# Altium PCB horus_psu.PcbDoc
Units mm, origin at the board's own origin, x right, y up, seen from the top; angles counter-clockwise.
Board outline 32.23 x 19.11 mm, 2 copper layers (Top Layer, Bottom Layer); 19 components, 14 nets, 75 pads, 18 vias.
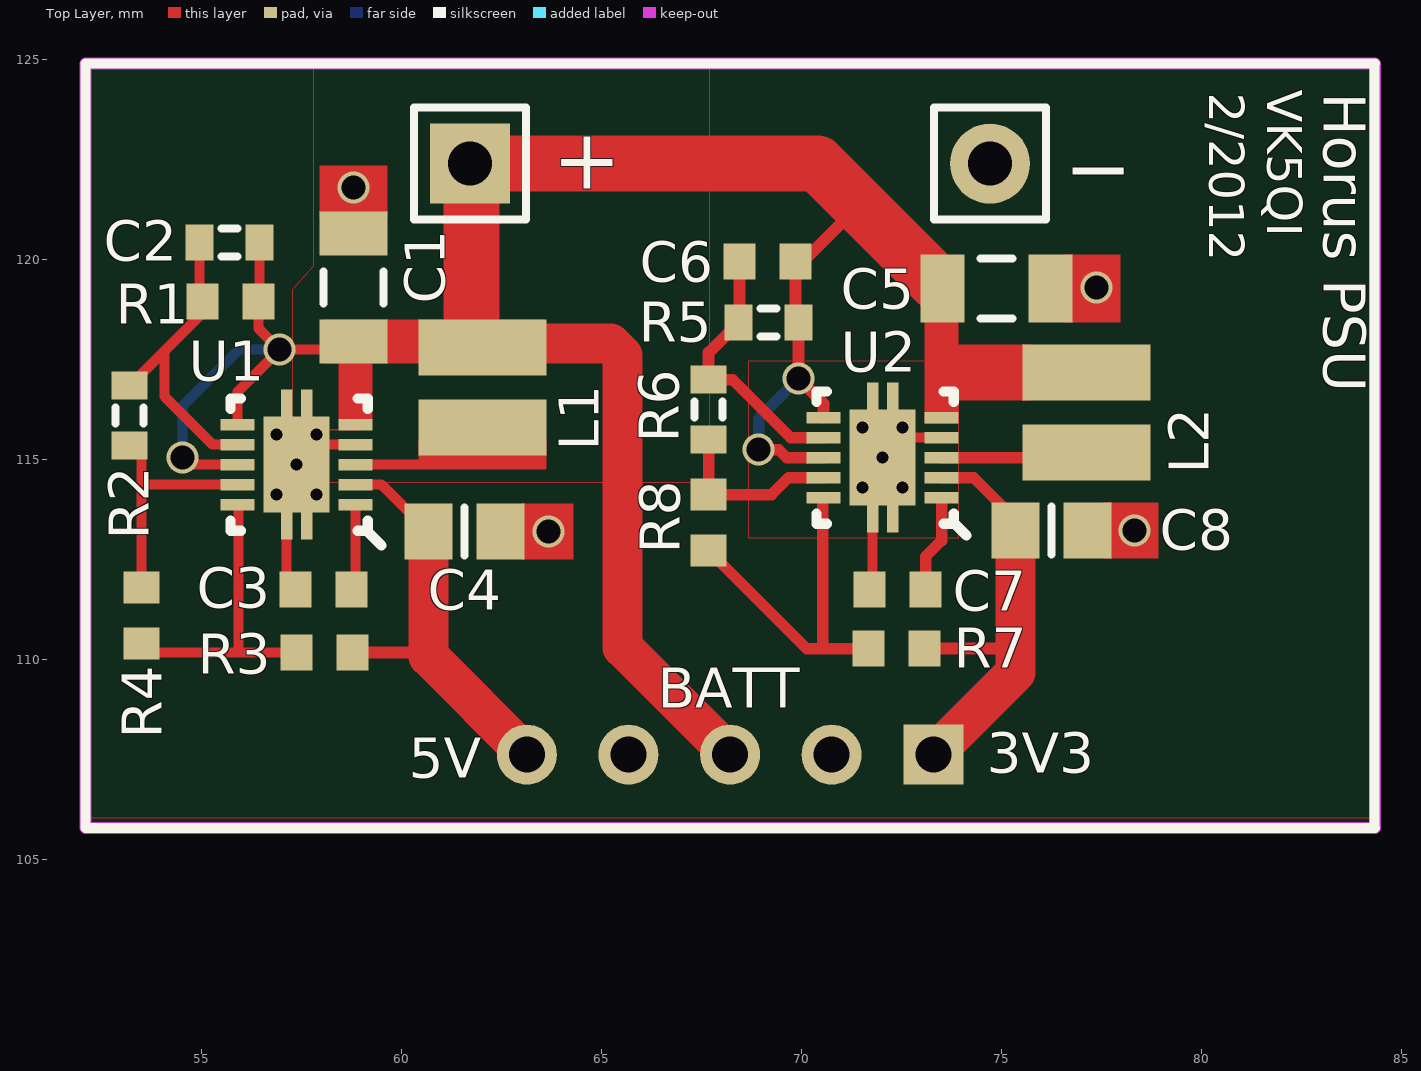
[diagram p0: Top Layer view]
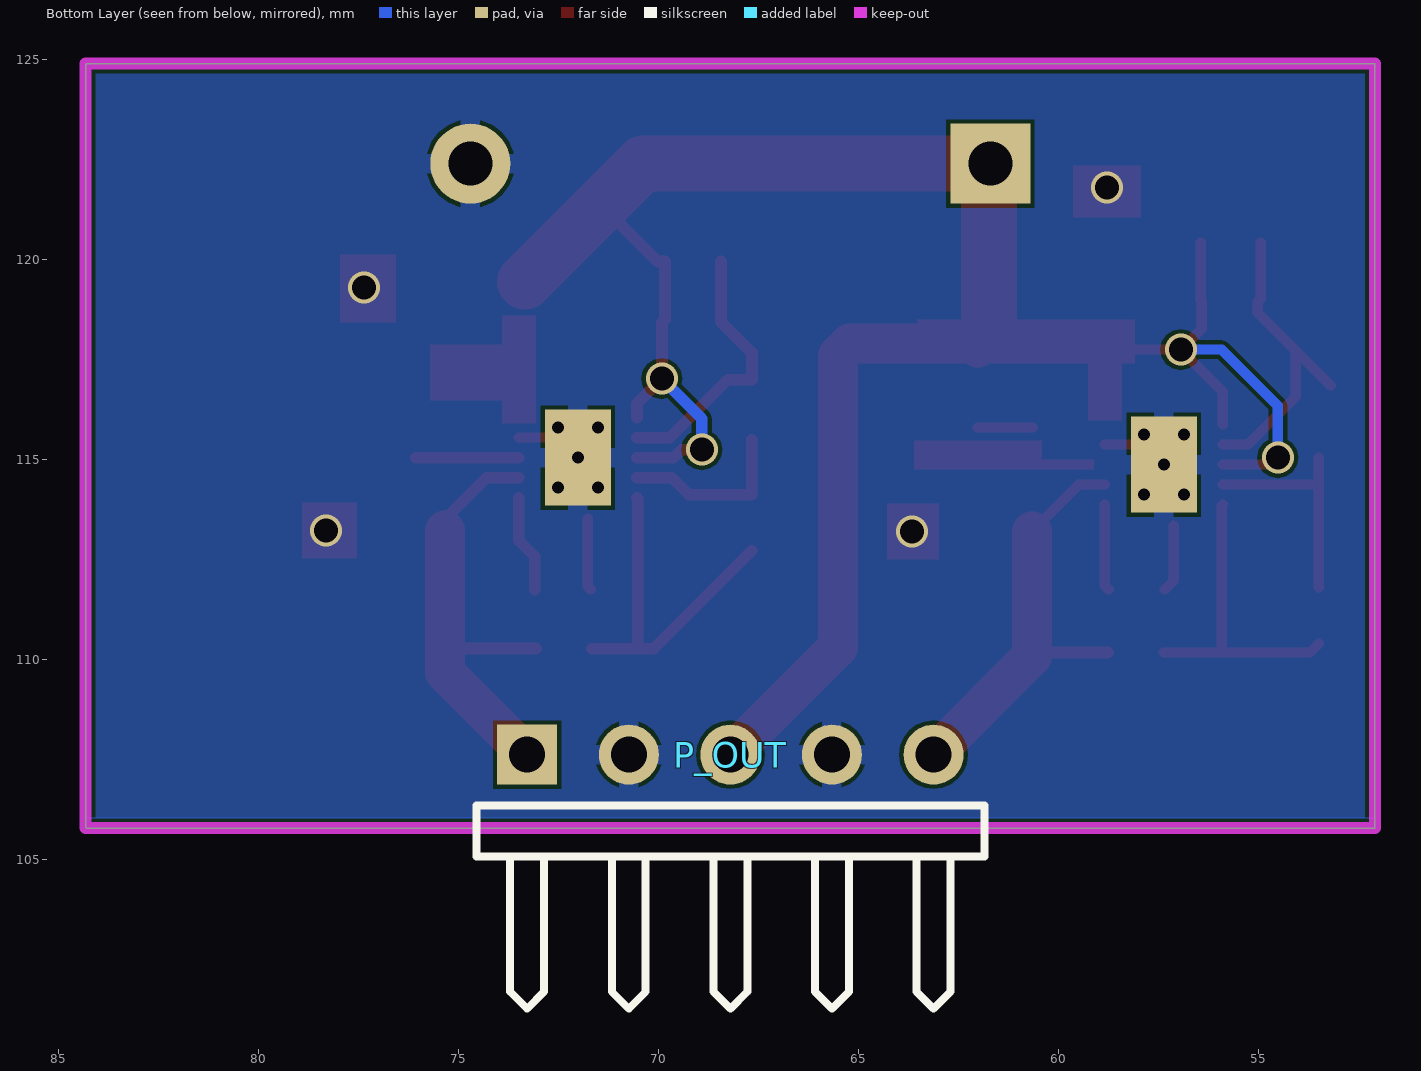
[diagram p1: Bottom Layer view, seen from below]

## Layer stack, top to bottom
Top Layer: signal copper 0.0356
Dielectric: dielectric 0.32, FR-4, Dk 4.8
Bottom Layer: signal copper 0.0356

## Board outline
52.1,105.791 52.1,124.9 84.328,124.9 84.328,105.791

## Design rules (kind name [scope] priority, off if disabled: settings)
Clearance [All] p1: gap=0.1
ComponentClearance [All] p1 off: gap=0.254 collisioncheckmode=3 verticalgap=0.254 showdistances=FALSE
PolygonConnect PolygonConnect_1 [IsVia] p1: connectstyle=Direct reliefconductorwidth=0.254 reliefentries=4 polygonreliefangle="90 Angle"
PolygonConnect [All] p2: connectstyle=Relief reliefconductorwidth=0.5 reliefentries=4 polygonreliefangle="90 Angle"
RoutingVias [All] p1: holewidth=0.3 width=0.4 viastyle="Through Hole" minholewidth=0.711 minwidth=1.27 maxholewidth=0.711 maxwidth=1.27
SilkscreenOverComponentPads [All] p1: minsilkscreentomaskgap=0.254
SolderMaskExpansion [All] p1: expansion=0.102
Width [All] p1: maxlimit=5 minlimit=0.1 preferedwidth=0.3
26 further rules are at their usual default settings.

## Components (designator, comment, footprint, x,y, rotation, side; value= is the part's Value field where it differs from the comment)
C1 "10V" C1206 58.8,119.3 r270 top
C2 "Cap Semi" 1608[0603] 55.725,118.95 r0 top
C3 "Cap Semi" 1608[0603] 58.05,111.75 r0 top
C4 "6.3V" 6-0805_N 61.575,113.2 r180 top
C5 "10V" C1206 74.875,119.275 r180 top
C6 "Cap Semi" 1608[0603] 69.15,119.95 r0 top
C7 "Cap Semi" 1608[0603] 72.4,111.75 r0 top
C8 "6.3V" 6-0805_N 76.25,113.225 r180 top
L1 "ELLVGG2R2N" ELLVGG 62.025,116.8 r90 top
L2 "ELLVGG2R2N" ELLVGG 77.125,116.175 r90 top
P_OUT "Header 5H" HDR1X5H 73.29,107.625 r180 bottom
R1 "Res3" J1-0603 55.7,120.425 r0 top
R2 "Res3" J1-0603 53.2,116.1 r90 top
R3 "Res3" 1608[0603] 58.075,110.175 r0 top
R4 "Res3" 1608[0603] 53.5,111.1 r270 top
R5 "Res3" J1-0603 69.175,118.425 r0 top
R6 "Res3" J1-0603 67.675,116.25 r90 top
R7 "Res3" 1608[0603] 72.375,110.275 r0 top
R8 "Res3" 1608[0603] 67.675,113.425 r270 top

## Footprints (in the part's own frame and the unit in brackets; to place one, negate y for a bottom-side part, rotate by r counter-clockwise, add the part's x,y. Pads: shape width x height; smd on the part's side, far side on the other; paste and mask are expansions set on the pad)
6-0805_N [mm] "Chip Resistor, Body 2.0x1.2mm, IPC Medium Density"
  rect 1.2x1.4 smd: 1(-0.9,0) 2(0.9,0)
  silkscreen extent 0,-0.6 0,0.6, body extent -1.07,-0.7 1.07,0.7, height 0.7
1608[0603] [mm] "Chip Capacitor, Body 1.6x0.8mm, IPC High Density"
  rect 0.8x0.9 smd: 1(-0.7,0) 2(0.7,0)
  body extent -0.87,-0.48 0.87,0.48, height 1.3
C1206 [mm] "Chip Capacitor, Body 3.2x1.6mm, IPC High Density"
  rect 1.1x1.7 smd: 1(-1.35,0) 2(1.35,0)
  silkscreen extent -0.4,-0.75 0.4,0.75, body extent -1.7,-0.9 1.7,0.9, height 1.3
ELLVGG [mm]
  rect 1.4x3.2 smd: 1(1,0) 2(-1,0)
HDR1X5H [mm] "Connector; Header; 5 Position; Right Angle"
  rect 1.5x1.5 hole 0.9: 1(0,0)
  round 1.5 hole 0.9: 2(2.54,0) 3(5.08,0) 4(7.62,0) 5(10.16,0)
  silkscreen extent -1.27,-6.35 11.43,-1.27
J1-0603 [mm] "Chip Resistor, Body 1.6x0.8mm, IPC High Density"
  rect 0.7x0.9 smd: 1(-0.75,0) 2(0.75,0)
  silkscreen extent -0.2,-0.35 0.2,0.35, body extent -0.85,-0.48 0.85,0.48, height 0.9

## Part data
C1 C4 C5 C8: library part "Cap Semi", "Capacitor (Semiconductor SIM Model)"
C2 C3 C6 C7: "Capacitor (Semiconductor SIM Model)"
L1 L2: library part Inductor, "Inductor"
P_OUT: "Header, 5-Pin, Right Angle"
R1 R2 R3 R4 R5 R6 R7 R8: "Resistor"

## Free pads (board coordinates)
  rect 0.28x0.7 smd: 0(57.125,113.351) 0(57.125,116.399) 0(57.625,113.351) 0(57.625,116.399) 0(71.775,113.526) 0(71.775,116.574) 0(72.275,113.526) 0(72.275,116.574)
  rect 1.65x2.4 smd: 0(57.375,114.875) 0(72.025,115.05)
  rect 1.65x2.4 smd far side: 0(57.375,114.875) 0(72.025,115.05)
  rect 0.85x0.28 smd: 1(58.85,113.875) 1(73.5,114.05) 2(58.85,114.375) 2(73.5,114.55) 3(58.85,114.875) 3(73.5,115.05) 4(58.85,115.375) 4(73.5,115.55) 5(58.85,115.875) 5(73.5,116.05) 6(55.9,115.875) 6(70.55,116.05) 7(55.9,115.375) 7(70.55,115.55) 8(55.9,114.875) 8(70.55,115.05) 9(55.9,114.375) 9(70.55,114.55) 10(55.9,113.875) 10(70.55,114.05)
  rect 2x2 hole 1.1: 1(61.71,122.4)
  round 2 hole 1.1: 1(74.71,122.4)

## Via types
v1: diameter 0.4, hole 0.3, Top Layer to Bottom Layer, 10 vias
v2: diameter 0.8, hole 0.6, Top Layer to Bottom Layer, tented both sides, 8 vias

## Nets (pads, with @x,y where several pads share a name; then routed paths per layer and width w, separated by ;. In a path a pad name is that pad's centre, name@x,y a point inside that pad or via, vN(x,y) a via of type N, cw(c..) or ccw(c..) an arc to the next point about the centre after c; other vN are vias at no path point)
3V3: C8.2 P_OUT.1 pad.2@73.5,114.55 R7.2 | length 11.3
  Top Layer w0.28: pad.2@73.5,114.55 74.3,114.55 75.3,113.55 C8.2@75.3,113.225
  Top Layer w0.3: R7.2 75.3,110.275 75.35,110.325
  Top Layer w1: P_OUT.1 75.35,109.685 75.35,110.325 C8.2
5V: C4.2 P_OUT.5 pad.2@58.85,114.375 R3.2 | length 10.8
  Top Layer w0.254: pad.2@58.85,114.375 59.5,114.375 C4.2
  Top Layer w0.3: R3.2 60.58,110.175 60.675,110.08
  Top Layer w1: C4.2 60.675,110.08 P_OUT.5
GND: C1.1 C3.1 C4.1 C5.1 C7.1 C8.1 P_OUT.2 P_OUT.4 pad.0 pad.1@74.71,122.4 pad.4 | length 6.9
  Top Layer w0.254: pad.0@57.125,113.351 57.125,111.975 C3.1 ; v1(57.375,114.875) 57.875,115.375 pad.4@58.85,115.375 ; C7.1 71.775,111.825 pad.0@71.775,113.526 ; v1(72.025,115.05) 72.525,115.55 pad.4@73.5,115.55
  other v1: 56.875,114.125 57.875,114.125 71.525,114.3 72.525,114.3 56.875,115.625 57.875,115.625 71.525,115.8 72.525,115.8
  other v2: 63.675,113.2 78.325,113.225 77.375,119.3 58.8,121.8
NetC2_1: C2.1 pad.7@55.9,115.375 R1.1 R2.2 | length 7.8
  Top Layer w0.254: R2.2 54.075,117.725 ; R1.1 54.95,119.025 C2.1 55.025,118.675 54.075,117.725 ; pad.7@55.9,115.375 55.275,115.375 54.075,116.575 54.075,117.725
NetC3_2: C3.2 pad.1@58.85,113.875 | length 2.2
  Top Layer w0.254: C3.2 58.85,111.85 pad.1@58.85,113.875
NetC6_1: C6.1 pad.7@70.55,115.55 R5.1 R6.2 | length 6.7
  Top Layer w0.28: R6.2 68.275,117 69.725,115.55 pad.7@70.55,115.55 ; R5.1 R5.1@68.45,118.45
  Top Layer w0.3: R6.2 67.675,117.675 R5.1 ; R5.1@68.45,118.45 C6.1
NetC7_2: C7.2 pad.1@73.5,114.05 | length 2.5
  Top Layer w0.28: C7.2 73.1,112.575 73.5,112.975 pad.1@73.5,114.05
NetL1_2: L1.2 pad.3@58.85,114.875 | length 1.4
  Top Layer w0.254: L1.2@60.65,115.8 L1.2
NetL2_2: L2.2 pad.3@73.5,115.05 | length 2.6
  Top Layer w0.28: pad.3@73.5,115.05 L2.2@76.075,115.05
NetR2_1: pad.9@55.9,114.375 R2.1 R4.1 | length 5.6
  Top Layer w0.254: R4.1 53.5,114.375 ; R2.1@53.5,115.05 53.5,114.375 ; pad.9@55.9,114.375 53.5,114.375
NetR3_1: pad.10@55.9,113.875 R3.1 R4.2 | length 7.7
  Top Layer w0.254: R4.2 53.725,110.175 55.925,110.175 ; pad.10@55.9,113.875 55.925,113.85 55.925,110.175 ; R3.1 55.925,110.175
NetR6_1: pad.9@70.55,114.55 R6.1 R8.1 | length 4.4
  Top Layer w0.28: R6.1 R8.1 69.25,114.125 69.675,114.55 pad.9@70.55,114.55
NetR7_1: pad.10@70.55,114.05 R7.1 R8.2 | length 8.8
  Top Layer w0.28: R8.2 70.125,110.275 70.525,110.275 ; pad.10@70.55,114.05 70.525,114.025 70.525,110.275 ; R7.1 70.525,110.275
V_BATT: C1.2 C2.2 C5.2 C6.2 L1.1 L2.1 P_OUT.3 pad.1@61.71,122.4 pad.5 pad.6 pad.8 R1.2 R5.2 | length 51.5
  Top Layer w0.254: v2(54.525,115.05) 54.7,114.875 pad.8@55.9,114.875 ; pad.6@55.9,115.875 55.9,116.7 v2(56.95,117.75) ; R1.2 56.45,118.975 C2.2 56.425,118.275 v2(56.95,117.75) ; C1.2 58.6,117.75 v2(56.95,117.75) ; pad.1@61.23,121.92 pad.1@61.71,122.4
  Top Layer w0.28: v2(68.925,115.25) 69.425,115.25 69.625,115.05 pad.8@70.55,115.05
  Top Layer w0.3: pad.6@70.55,116.05 70.55,116.4 v2(69.925,117.025) R5.2 69.85,118.5 C6.2 70.025,119.95 71.438,121.362
  Top Layer w1: L1.1 62.125,117.9 65.225,117.9 65.525,117.6 65.525,110.31 P_OUT.3
  Top Layer w1.4: pad.1@61.71,122.4 70.4,122.4 71.438,121.362 C5.2@73.35,119.45
  Bottom Layer w0.254: v2(54.525,115.05) 54.525,116.35 55.925,117.75 v2(56.95,117.75)
  Bottom Layer w0.28: v2(68.925,115.25) 68.925,116.025 v2(69.925,117.025)

## Polygon pours and split planes (outlines as drawn)
GND on Bottom Layer "Top Layer-No Net" (solid, shelved, pour order 16): 52.1,106.045 52.1,124.9 84.328,124.9 84.328,106.045
V_BATT on Top Layer "Top Layer-No Net" (solid, shelved, pour order 10): 67.691,124.9 67.691,114.427 57.409,114.427 57.277,114.574 57.277,115.746 58.991,115.746 57.277,115.746 57.277,119.263 57.804,119.849 57.804,124.9
no net on Top Layer "Top Layer-No Net" (solid, shelved, pour order 12): 68.675,117.475 73.795,117.475 73.914,117.322 73.914,113.03 68.675,113.03
GND on Top Layer "Top Layer-No Net" (solid, shelved, pour order 14): 52.1,124.9 52.1,106.045 84.328,106.045 84.328,124.9
GND on Bottom Layer "Top Layer-No Net" (solid, pour order 18): 52.175,105.791 52.175,124.825 52.1,124.9 84.328,124.9 84.328,105.791

## Keep-outs
Keep-Out Layer:
  the board outline again, w0.3

## Other copper
Top Layer:
  rectangle net GND: 77.55,112.525 78.925,113.925
  rectangle net GND: 76.575,118.425 77.975,120.125
  rectangle net GND: 63,112.5 64.3,113.9
  rectangle net GND: 57.95,121.05 59.65,122.35
  rectangle net V_BATT: 73.625,116.475 75.725,117.875
  rectangle net V_BATT: 73.075,115.9 73.925,118.6
  rectangle net NetL1_2: 59.125,114.75 61.075,115
  rectangle net NetL1_2: 60.425,114.75 63.625,115.475
  rectangle net V_BATT: 58.425,115.975 59.275,117.8
  rectangle net V_BATT: 58.1,117.4 63.55,118.5
  rectangle net V_BATT: 61.05,117.525 62.45,123.125

## Silkscreen, mask and mechanical layers (free items; w line width, h text height)
Top Overlay:
  lines w0.2: 60.31,121 60.31,123.8 63.11,123.8 63.11,121 60.31,121 ; 73.31,121 76.11,121 76.11,123.8 73.31,123.8 73.31,121
  lines w0.254: 55.724,113.478 55.724,113.224 55.978,113.224 ; 55.724,116.272 55.724,116.526 55.978,116.526 ; 58.899,113.224 59.153,113.224 59.153,113.478 ; 58.899,116.526 59.153,116.526 59.153,116.272 ; 59.125,113.224 59.126,113.224 59.5,112.85 ; 70.374,113.653 70.374,113.399 70.628,113.399 ; 70.374,116.447 70.374,116.701 70.628,116.701 ; 73.549,113.399 73.803,113.399 ; 73.549,116.701 73.803,116.701 73.803,116.447 ; 73.803,113.653 73.803,113.399 ; 74.125,113.1 73.826,113.399 73.803,113.399 ; 84.325,105.794 84.325,124.897 84.328,124.9 84.253,124.9 52.1,124.9 52.1,105.791 82.566,105.791 84.328,105.791
  text "VK5QI" at 81.35,124.25 h1.5 r270
  text "2/2012" at 79.9,124.175 h1.5 r270
  text "Horus PSU" at 82.7,124.175 h1.8 r270
  text "_" at 76.8,122.7 h1.8
  text "+" at 63.775,121.775 h1.5
  text "U2" at 70.975,117.2 h1
  text "U1" at 54.675,116.975 h1
  text "BATT" at 66.4,108.8 h1
  text "3V3" at 74.625,107.175 h1
  text "5V" at 60.175,107.05 h1
Drill Drawing:
  text ".LEGEND" at 105.88,81.28 h1.52
  text "Drill Drawing." at 105.88,78.74 h1.52

## Dimensions
52.1,105.791 to 84.328,105.791 on Mechanical 1
52.1,105.791 to 52.1,124.9 on Mechanical 1